# Altium PCB KUOZHAN.PCBDOC (part 11 of 21)
Units mm, origin at the board's own origin, x right, y up, seen from the top; angles counter-clockwise.
Board outline 165.51 x 116.38 mm, 2 copper layers (Top Layer, Bottom Layer); 171 components, 245 nets, 894 pads, 298 vias.
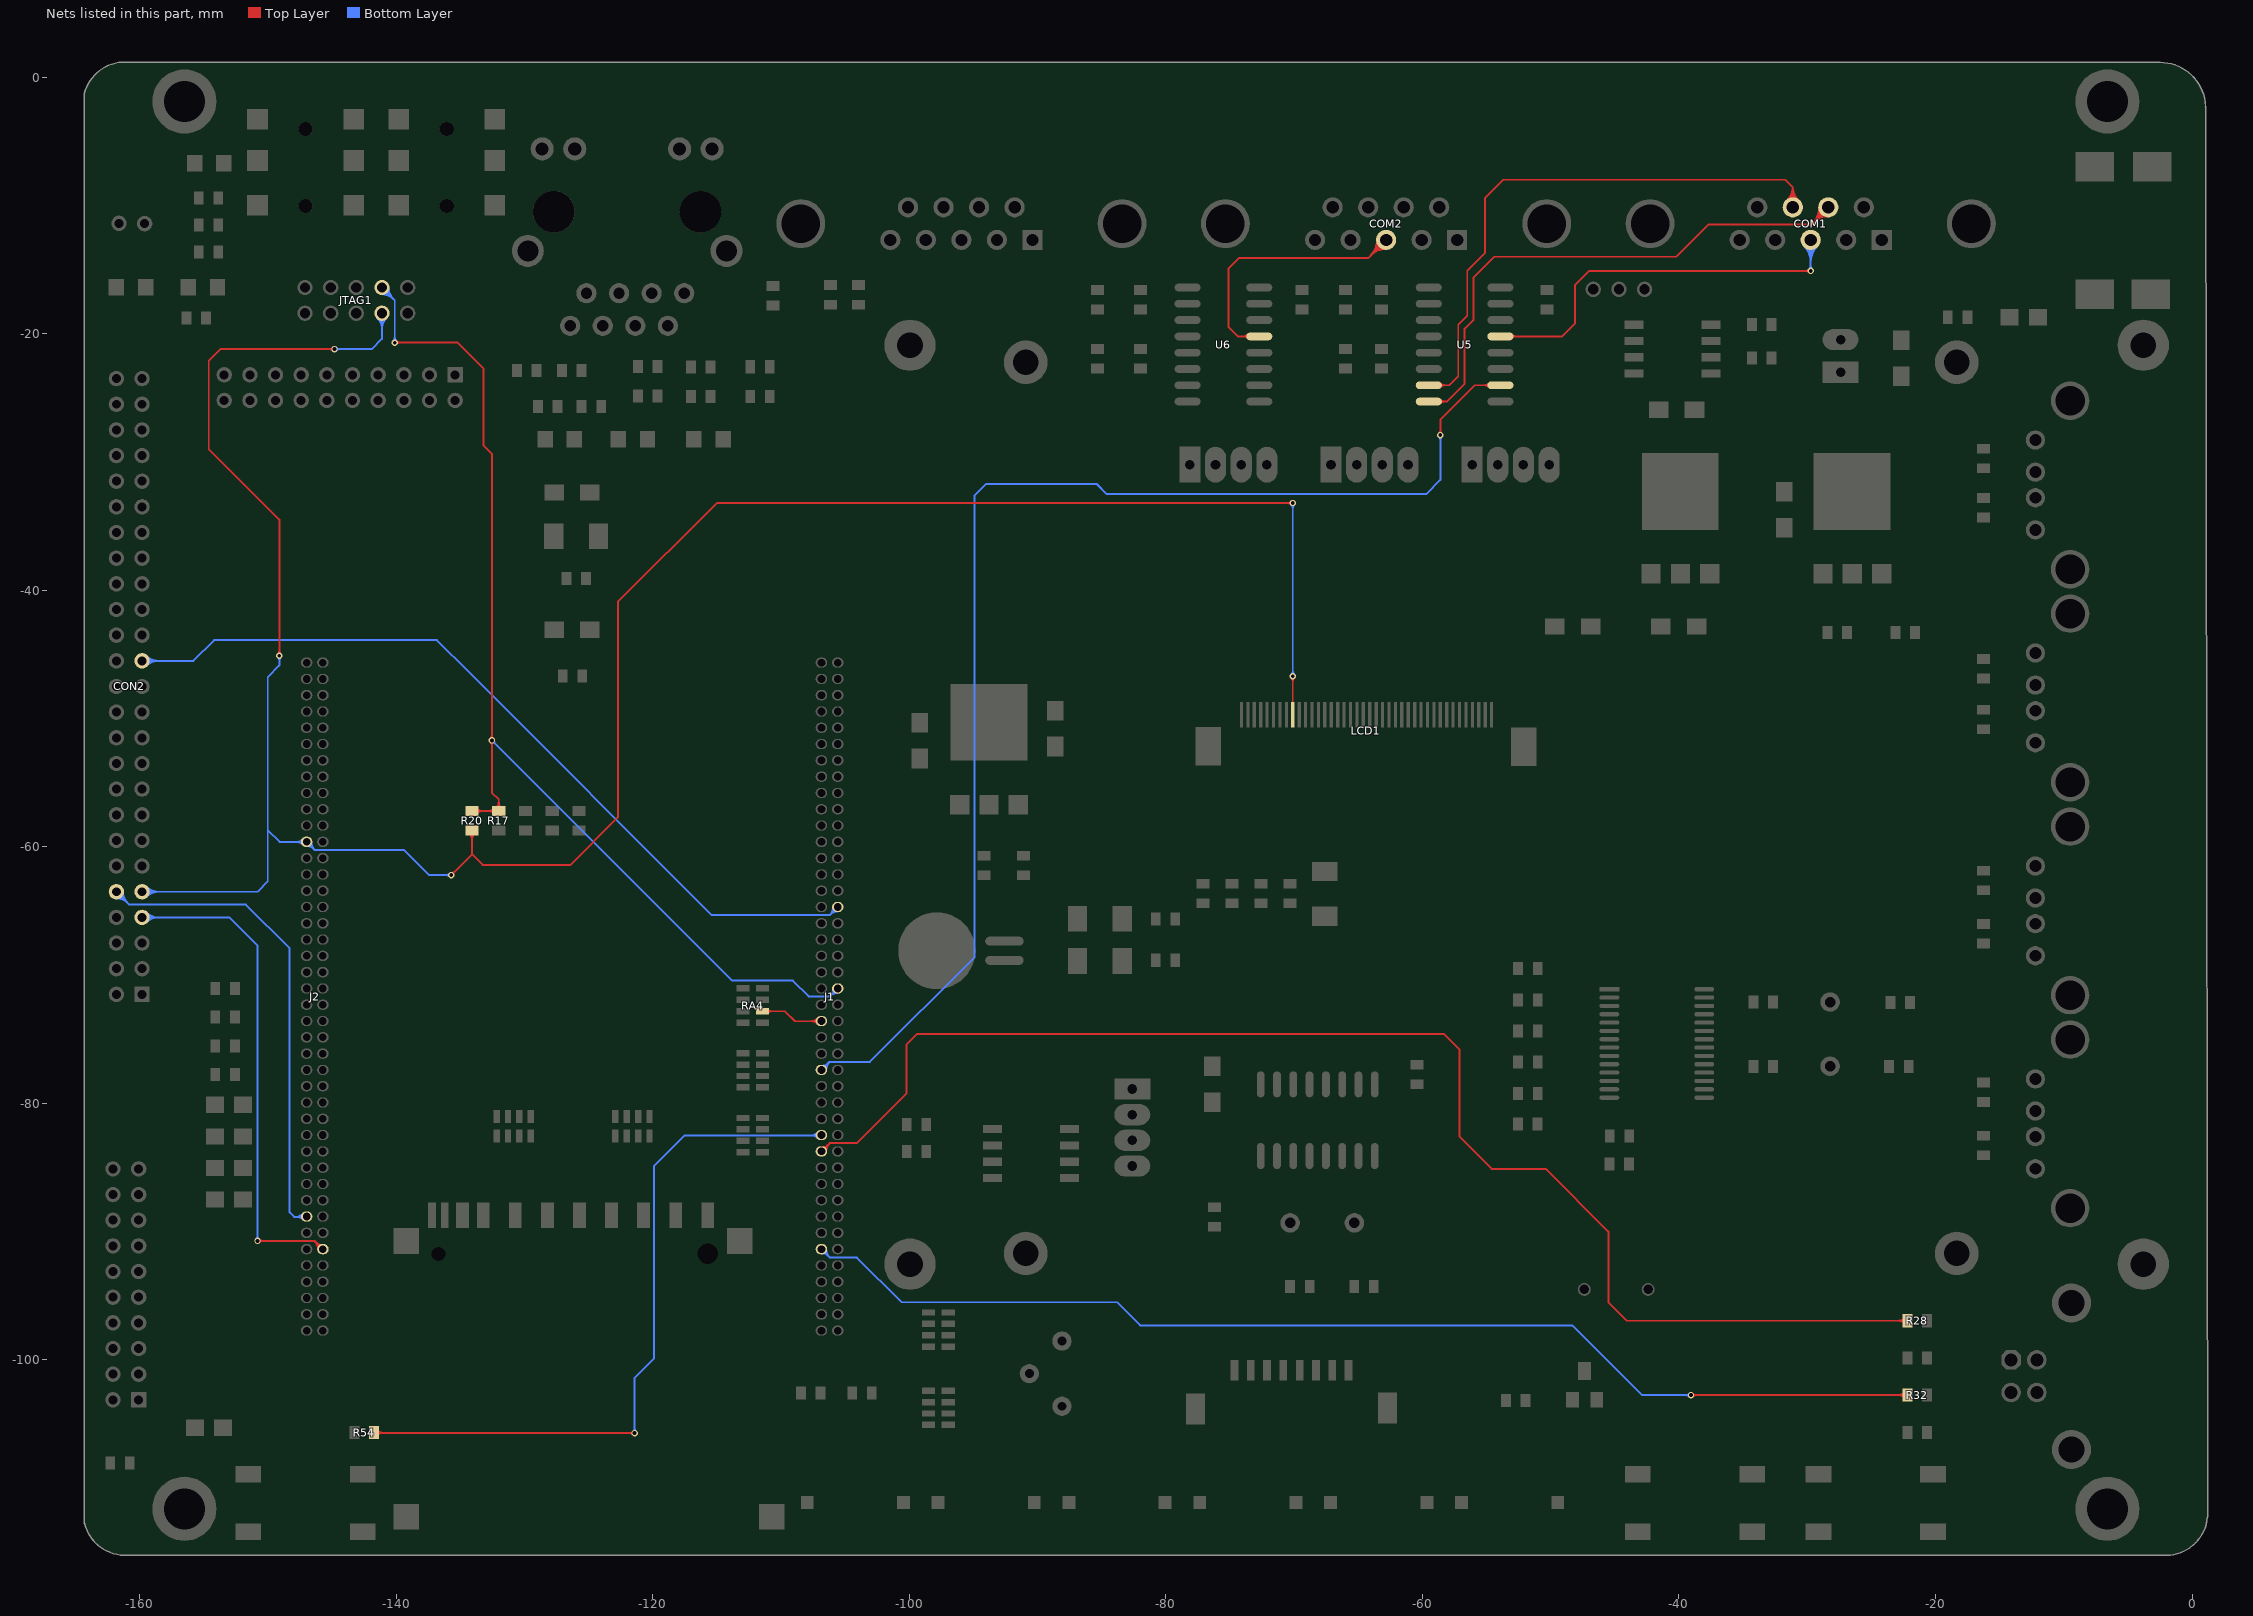
[diagram p11: the nets of this part, all layers, seen from the top]

## Via types
v1: diameter 0.5, hole 0.3, Top Layer to Bottom Layer, 272 vias
v2: diameter 0.6, hole 0.3, Top Layer to Bottom Layer, 24 vias
v3: diameter 0.9, hole 0.9, Top Layer to Bottom Layer, 2 vias

## Nets (pads, with @x,y where several pads share a name; then routed paths per layer and width w, separated by ;. In a path a pad name is that pad's centre, name@x,y a point inside that pad or via, vN(x,y) a via of type N, cw(c..) or ccw(c..) an arc to the next point about the centre after c; other vN are vias at no path point) (continued)
NRESET: CON2.9 J2.23 JTAG1.4 LCD1.32 R20.2 | length 269.3
  Top Layer w0.15: v1@-149.224,-44.976 ccw(c-149.522,-44.678) -149.1,-44.678 ccw(c-148.678,-44.678) v1@-148.976,-44.976 ; v1(-149.1,-45.1) -149.1,-34.5 -154.6,-29 -154.6,-22.1 -153.7,-21.2 v1(-144.8,-21.2) ; v1@-144.888,-21.288 ccw(c-145.102,-21.502) -145.102,-21.2 ccw(c-145.102,-20.898) v1@-144.888,-21.112 ; v1(-135.7,-62.2) -134.078,-60.578 ; v1@-135.7,-62.075 ccw(c-135.7,-61.773) -135.487,-61.987 ccw(c-135.273,-62.2) v1@-135.575,-62.2 ; R20.2@-134.078,-58.724 -134.078,-60.578 ; v1@-70.188,-46.788 cw(c-70.402,-47.002) -70.1,-47.002 cw(c-69.798,-47.002) v1@-70.012,-46.788 ; v1@-70.188,-33.288 ccw(c-70.402,-33.502) -70.402,-33.2 ccw(c-70.402,-32.898) v1@-70.188,-33.112 ; LCD1.32@-70.1,-49.7 v1(-70.1,-46.7) ; v1(-70.1,-33.2) -115,-33.2 -122.7,-40.9 -122.7,-57.7 -126.4,-61.4 -133.257,-61.4 -134.078,-60.578 ; -145.222,-21.2 cw(c-145.222,-21.622) v1@-144.924,-21.324 ; -145.222,-21.2 ccw(c-145.222,-20.778) v1@-144.924,-21.076 ; -145.222,-21.2 cw(c-145.222,-21.622) v1@-144.924,-21.324 ; -145.222,-21.2 ccw(c-145.222,-20.778) v1@-144.924,-21.076 ; -145.222,-21.2 cw(c-145.222,-21.622) v1@-144.924,-21.324 ; -145.222,-21.2 ccw(c-145.222,-20.778) v1@-144.924,-21.076 ; -145.222,-21.2 ccw(c-145.222,-20.778) v1@-144.924,-21.076 ; -145.222,-21.2 cw(c-145.222,-21.622) v1@-144.924,-21.324 ; v1@-135.7,-62.025 ccw(c-135.7,-61.603) -135.401,-61.901 ; v1@-135.7,-62.025 ccw(c-135.7,-61.603) -135.401,-61.901 ; v1@-135.7,-62.025 ccw(c-135.7,-61.603) -135.401,-61.901 ; v1@-135.7,-62.025 ccw(c-135.7,-61.603) -135.401,-61.901 ; v1@-135.525,-62.2 cw(c-135.103,-62.2) -135.401,-61.901 ; v1@-135.525,-62.2 cw(c-135.103,-62.2) -135.401,-61.901 ; v1@-135.525,-62.2 cw(c-135.103,-62.2) -135.401,-61.901 ; v1@-135.525,-62.2 cw(c-135.103,-62.2) -135.401,-61.901 ; R20.2@-134.295,-58.94 cw(c-134.817,-59.463) -134.078,-59.463 ; R20.2@-134.295,-58.94 cw(c-134.817,-59.463) -134.078,-59.463 ; R20.2@-134.295,-58.94 cw(c-134.817,-59.463) -134.078,-59.463 ; R20.2@-134.295,-58.94 cw(c-134.817,-59.463) -134.078,-59.463 ; R20.2@-134.295,-58.94 cw(c-134.817,-59.463) -134.078,-59.463 ; -134.078,-59.463 cw(c-133.34,-59.463) R20.2@-133.862,-58.94 ; -134.078,-59.463 cw(c-133.34,-59.463) R20.2@-133.862,-58.94 ; -134.078,-59.463 cw(c-133.34,-59.463) R20.2@-133.862,-58.94 ; -134.078,-59.463 cw(c-133.34,-59.463) R20.2@-133.862,-58.94 ; -134.078,-59.463 cw(c-133.34,-59.463) R20.2@-133.862,-58.94 ; -70.522,-33.2 cw(c-70.522,-33.622) v1@-70.224,-33.324 ; -70.522,-33.2 ccw(c-70.522,-32.778) v1@-70.224,-33.076 ; -70.522,-33.2 cw(c-70.522,-33.622) v1@-70.224,-33.324 ; -70.522,-33.2 ccw(c-70.522,-32.778) v1@-70.224,-33.076 ; -70.522,-33.2 cw(c-70.522,-33.622) v1@-70.224,-33.324 ; -70.522,-33.2 ccw(c-70.522,-32.778) v1@-70.224,-33.076 ; -70.522,-33.2 ccw(c-70.522,-32.778) v1@-70.224,-33.076 ; -70.522,-33.2 cw(c-70.522,-33.622) v1@-70.224,-33.324 ; v1@-70.224,-46.824 cw(c-70.522,-47.122) -70.1,-47.122 ; v1@-70.224,-46.824 cw(c-70.522,-47.122) -70.1,-47.122 ; v1@-70.224,-46.824 cw(c-70.522,-47.122) -70.1,-47.122 ; v1@-70.224,-46.824 cw(c-70.522,-47.122) -70.1,-47.122 ; -70.1,-47.122 cw(c-69.678,-47.122) v1@-69.976,-46.824 ; -70.1,-47.122 cw(c-69.678,-47.122) v1@-69.976,-46.824 ; -70.1,-47.122 cw(c-69.678,-47.122) v1@-69.976,-46.824 ; -70.1,-47.122 cw(c-69.678,-47.122) v1@-69.976,-46.824
  Bottom Layer w0.15: CON2.9@-159.8,-63.5 -150.8,-63.5 -150,-62.7 -150,-46.763 -149.1,-45.863 v1(-149.1,-45.1) ; CON2.9@-159.535,-63.765 cw(c-158.895,-64.405) -158.895,-63.5 cw(c-158.895,-62.595) CON2.9@-159.535,-63.235 ; CON2.9@-159.429,-63.871 cw(c-158.533,-64.767) -158.533,-63.5 cw(c-158.533,-62.233) CON2.9@-159.429,-63.129 ; -150,-58.7 -149.082,-59.618 -146.973,-59.618 -146.327,-60.264 ; v1@-149.188,-45.188 cw(c-149.402,-45.402) -149.1,-45.402 cw(c-148.798,-45.402) v1@-149.012,-45.188 ; J2.23@-146.973,-59.609 -146.348,-60.234 -139.379,-60.234 ; v1(-144.8,-21.2) -141.9,-21.2 -141.099,-20.399 JTAG1.4@-141.099,-18.403 ; v1@-144.712,-21.288 cw(c-144.498,-21.502) -144.498,-21.2 cw(c-144.498,-20.898) v1@-144.712,-21.112 ; -139.349,-60.264 -137.413,-62.2 v1(-135.7,-62.2) ; v1@-135.788,-62.288 ccw(c-136.002,-62.502) -136.002,-62.2 ccw(c-136.002,-61.898) v1@-135.788,-62.112 ; v1@-70.188,-46.612 ccw(c-70.402,-46.398) -70.1,-46.398 ccw(c-69.798,-46.398) v1@-70.012,-46.612 ; v1@-70.188,-33.288 cw(c-70.402,-33.502) -70.1,-33.502 cw(c-69.798,-33.502) v1@-70.012,-33.288 ; v1(-70.1,-46.7) v1(-70.1,-33.2) ; v1@-149.224,-45.224 cw(c-149.522,-45.522) -149.1,-45.522 ; v1@-149.224,-45.224 cw(c-149.522,-45.522) -149.1,-45.522 ; v1@-149.224,-45.224 cw(c-149.522,-45.522) -149.1,-45.522 ; v1@-149.224,-45.224 cw(c-149.522,-45.522) -149.1,-45.522 ; -149.1,-45.522 cw(c-148.678,-45.522) v1@-148.976,-45.224 ; -149.1,-45.522 cw(c-148.678,-45.522) v1@-148.976,-45.224 ; -149.1,-45.522 cw(c-148.678,-45.522) v1@-148.976,-45.224 ; -149.1,-45.522 cw(c-148.678,-45.522) v1@-148.976,-45.224 ; -147.757,-59.618 cw(c-147.757,-60.403) J2.23@-147.203,-59.848 ; -147.757,-59.618 ccw(c-147.757,-58.833) J2.23@-147.203,-59.388 ; -147.757,-59.618 cw(c-147.757,-60.403) J2.23@-147.203,-59.848 ; -147.757,-59.618 ccw(c-147.757,-58.833) J2.23@-147.203,-59.388 ; -147.757,-59.618 cw(c-147.757,-60.403) J2.23@-147.203,-59.848 ; -147.757,-59.618 ccw(c-147.757,-58.833) J2.23@-147.203,-59.388 ; J2.23@-147.395,-59.618 cw(c-147.395,-60.041) J2.23@-147.097,-59.742 ; J2.23@-147.395,-59.618 ccw(c-147.395,-59.196) J2.23@-147.097,-59.494 ; J2.23@-147.395,-59.618 cw(c-147.395,-60.041) J2.23@-147.097,-59.742 ; J2.23@-147.395,-59.618 ccw(c-147.395,-59.196) J2.23@-147.097,-59.494 ; J2.23@-147.395,-59.618 cw(c-147.395,-60.041) J2.23@-147.097,-59.742 ; J2.23@-147.395,-59.618 ccw(c-147.395,-59.196) J2.23@-147.097,-59.494 ; J2.23@-146.973,-59.943 cw(c-146.973,-60.728) -146.418,-60.173 ; J2.23@-146.973,-59.943 cw(c-146.973,-60.728) -146.418,-60.173 ; J2.23@-146.973,-59.943 cw(c-146.973,-60.728) -146.418,-60.173 ; J2.23@-146.973,-59.793 cw(c-146.973,-60.216) J2.23@-146.674,-59.917 ; J2.23@-146.973,-59.793 cw(c-146.973,-60.216) J2.23@-146.674,-59.917 ; J2.23@-146.973,-59.793 cw(c-146.973,-60.216) J2.23@-146.674,-59.917 ; J2.23@-146.923,-59.934 cw(c-146.923,-60.598) -146.453,-60.129 ccw(c-146.923,-60.598) J2.23@-146.923,-59.934 ; J2.23@-146.923,-59.934 cw(c-146.923,-60.577) -146.468,-60.123 ccw(c-146.923,-60.577) J2.23@-146.923,-59.934 ; J2.23@-146.798,-59.618 ccw(c-146.375,-59.618) J2.23@-146.674,-59.917 ; J2.23@-146.798,-59.618 ccw(c-146.375,-59.618) J2.23@-146.674,-59.917 ; J2.23@-146.798,-59.618 ccw(c-146.375,-59.618) J2.23@-146.674,-59.917 ; J2.23@-146.648,-59.618 ccw(c-145.863,-59.618) -146.418,-60.173 ; J2.23@-146.648,-59.618 ccw(c-145.863,-59.618) -146.418,-60.173 ; J2.23@-146.648,-59.618 ccw(c-145.863,-59.618) -146.418,-60.173 ; v1@-144.676,-21.324 cw(c-144.378,-21.622) -144.378,-21.2 ; v1@-144.676,-21.324 cw(c-144.378,-21.622) -144.378,-21.2 ; v1@-144.676,-21.324 cw(c-144.378,-21.622) -144.378,-21.2 ; v1@-144.676,-21.324 cw(c-144.378,-21.622) -144.378,-21.2 ; v1@-144.676,-21.076 ccw(c-144.378,-20.778) -144.378,-21.2 ; v1@-144.676,-21.076 ccw(c-144.378,-20.778) -144.378,-21.2 ; v1@-144.676,-21.076 ccw(c-144.378,-20.778) -144.378,-21.2 ; v1@-144.676,-21.076 ccw(c-144.378,-20.778) -144.378,-21.2 ; JTAG1.4@-141.47,-18.774 cw(c-142.366,-19.67) -141.099,-19.67 ; JTAG1.4@-141.47,-18.774 cw(c-142.366,-19.67) -141.099,-19.67 ; JTAG1.4@-141.47,-18.774 cw(c-142.366,-19.67) -141.099,-19.67 ; JTAG1.4@-141.47,-18.774 cw(c-142.366,-19.67) -141.099,-19.67 ; JTAG1.4@-141.47,-18.774 cw(c-142.366,-19.67) -141.099,-19.67 ; JTAG1.4@-141.364,-18.668 cw(c-142.004,-19.308) -141.099,-19.308 ; JTAG1.4@-141.364,-18.668 cw(c-142.004,-19.308) -141.099,-19.308 ; JTAG1.4@-141.364,-18.668 cw(c-142.004,-19.308) -141.099,-19.308 ; JTAG1.4@-141.364,-18.668 cw(c-142.004,-19.308) -141.099,-19.308 ; JTAG1.4@-141.364,-18.668 cw(c-142.004,-19.308) -141.099,-19.308 ; -141.099,-19.67 cw(c-139.831,-19.67) JTAG1.4@-140.728,-18.774 ; -141.099,-19.67 cw(c-139.831,-19.67) JTAG1.4@-140.728,-18.774 ; -141.099,-19.67 cw(c-139.831,-19.67) JTAG1.4@-140.728,-18.774 ; -141.099,-19.67 cw(c-139.831,-19.67) JTAG1.4@-140.728,-18.774 ; -141.099,-19.67 cw(c-139.831,-19.67) JTAG1.4@-140.728,-18.774 ; -141.099,-19.308 cw(c-140.193,-19.308) JTAG1.4@-140.834,-18.668 ; -141.099,-19.308 cw(c-140.193,-19.308) JTAG1.4@-140.834,-18.668 ; -141.099,-19.308 cw(c-140.193,-19.308) JTAG1.4@-140.834,-18.668 ; -141.099,-19.308 cw(c-140.193,-19.308) JTAG1.4@-140.834,-18.668 ; -141.099,-19.308 cw(c-140.193,-19.308) JTAG1.4@-140.834,-18.668 ; -136.122,-62.2 cw(c-136.122,-62.622) v1@-135.824,-62.324 ; -136.122,-62.2 ccw(c-136.122,-61.778) v1@-135.824,-62.076 ; -136.122,-62.2 cw(c-136.122,-62.622) v1@-135.824,-62.324 ; -136.122,-62.2 ccw(c-136.122,-61.778) v1@-135.824,-62.076 ; -136.122,-62.2 cw(c-136.122,-62.622) v1@-135.824,-62.324 ; -136.122,-62.2 ccw(c-136.122,-61.778) v1@-135.824,-62.076 ; -136.122,-62.2 ccw(c-136.122,-61.778) v1@-135.824,-62.076 ; -136.122,-62.2 cw(c-136.122,-62.622) v1@-135.824,-62.324 ; v1@-70.224,-46.576 ccw(c-70.522,-46.278) -70.1,-46.278 ; v1@-70.224,-46.576 ccw(c-70.522,-46.278) -70.1,-46.278 ; v1@-70.224,-46.576 ccw(c-70.522,-46.278) -70.1,-46.278 ; v1@-70.224,-46.576 ccw(c-70.522,-46.278) -70.1,-46.278 ; v1@-70.224,-33.324 cw(c-70.522,-33.622) -70.1,-33.622 ; v1@-70.224,-33.324 cw(c-70.522,-33.622) -70.1,-33.622 ; v1@-70.224,-33.324 cw(c-70.522,-33.622) -70.1,-33.622 ; v1@-70.224,-33.324 cw(c-70.522,-33.622) -70.1,-33.622 ; -70.1,-46.278 ccw(c-69.678,-46.278) v1@-69.976,-46.576 ; -70.1,-46.278 ccw(c-69.678,-46.278) v1@-69.976,-46.576 ; -70.1,-46.278 ccw(c-69.678,-46.278) v1@-69.976,-46.576 ; -70.1,-46.278 ccw(c-69.678,-46.278) v1@-69.976,-46.576 ; -70.1,-33.622 cw(c-69.678,-33.622) v1@-69.976,-33.324 ; -70.1,-33.622 cw(c-69.678,-33.622) v1@-69.976,-33.324 ; -70.1,-33.622 cw(c-69.678,-33.622) v1@-69.976,-33.324 ; -70.1,-33.622 cw(c-69.678,-33.622) v1@-69.976,-33.324 ; -147.828,-59.618 ccw(c-147.828,-58.804) -147.253,-59.38 cw(c-147.828,-58.804) -147.828,-59.618 ; -147.786,-59.618 cw(c-147.786,-60.373) -147.253,-59.839 ccw(c-147.786,-60.373) -147.786,-59.618 ; -147.466,-59.618 ccw(c-147.466,-59.166) -147.147,-59.486 cw(c-147.466,-59.166) -147.466,-59.618 ; -147.424,-59.618 cw(c-147.424,-60.011) -147.147,-59.733 ccw(c-147.424,-60.011) -147.424,-59.618 ; J2.23@-146.748,-59.618 ccw(c-146.283,-59.641) -146.612,-59.97 cw(c-146.283,-59.641) J2.23@-146.748,-59.618 ; J2.23@-146.748,-59.616 ccw(c-146.243,-59.633) -146.6,-59.991 cw(c-146.243,-59.633) J2.23@-146.748,-59.616 ; J2.23@-146.598,-59.625 ccw(c-145.827,-59.663) -146.373,-60.209 cw(c-145.827,-59.663) J2.23@-146.598,-59.625 ; J2.23@-146.598,-59.621 ccw(c-145.772,-59.65) -146.356,-60.235 cw(c-145.772,-59.65) J2.23@-146.598,-59.621
NRTS0: J1.51 U5.10 | length 123.2
  Top Layer w0.15: v1@-58.688,-27.812 ccw(c-58.902,-27.598) -58.6,-27.598 ccw(c-58.298,-27.598) v1@-58.512,-27.812 ; v1(-58.6,-27.9) -58.6,-26.7 -55.92,-24.02 U5.10@-53.912,-24.02 ; v1@-58.724,-27.776 ccw(c-59.022,-27.478) -58.6,-27.478 ; v1@-58.724,-27.776 ccw(c-59.022,-27.478) -58.6,-27.478 ; v1@-58.724,-27.776 ccw(c-59.022,-27.478) -58.6,-27.478 ; v1@-58.724,-27.776 ccw(c-59.022,-27.478) -58.6,-27.478 ; -58.6,-27.478 ccw(c-58.178,-27.478) v1@-58.476,-27.776 ; -58.6,-27.478 ccw(c-58.178,-27.478) v1@-58.476,-27.776 ; -58.6,-27.478 ccw(c-58.178,-27.478) v1@-58.476,-27.776 ; -58.6,-27.478 ccw(c-58.178,-27.478) v1@-58.476,-27.776 ; -55.178,-24.02 cw(c-55.178,-24.575) U5.10@-54.786,-24.182 ; -55.178,-24.02 ccw(c-55.178,-23.465) U5.10@-54.786,-23.858 ; -55.178,-24.02 cw(c-55.178,-24.575) U5.10@-54.786,-24.182 ; -55.178,-24.02 ccw(c-55.178,-23.465) U5.10@-54.786,-23.858 ; -55.178,-24.02 cw(c-55.178,-24.575) U5.10@-54.786,-24.182 ; -55.178,-24.02 ccw(c-55.178,-23.465) U5.10@-54.786,-23.858 ; -55.178,-24.02 cw(c-55.178,-24.575) U5.10@-54.786,-24.182 ; -55.178,-24.02 ccw(c-55.178,-23.465) U5.10@-54.786,-23.858 ; -55.178,-24.02 ccw(c-55.178,-23.465) U5.10@-54.786,-23.858 ; -55.178,-24.02 cw(c-55.178,-24.575) U5.10@-54.786,-24.182
  Bottom Layer w0.15: J1.51@-106.841,-77.41 -106.216,-76.785 ; J1.51@-106.841,-77.389 -106.216,-76.764 ; v1@-58.688,-27.988 cw(c-58.902,-28.202) -58.6,-28.202 cw(c-58.298,-28.202) v1@-58.512,-27.988 ; v1(-58.6,-27.9) -58.6,-31.4 -59.7,-32.5 -84.6,-32.5 -85.4,-31.7 -94,-31.7 -94.9,-32.6 -94.9,-68.6 -103.064,-76.764 -106.216,-76.764 ; J1.51@-106.841,-77.235 ccw(c-106.841,-76.813) J1.51@-106.542,-77.112 ; J1.51@-106.841,-77.235 ccw(c-106.841,-76.813) J1.51@-106.542,-77.112 ; J1.51@-106.841,-77.235 ccw(c-106.841,-76.813) J1.51@-106.542,-77.112 ; J1.51@-106.841,-77.085 ccw(c-106.841,-76.301) -106.286,-76.856 ; J1.51@-106.841,-77.085 ccw(c-106.841,-76.301) -106.286,-76.856 ; J1.51@-106.841,-77.085 ccw(c-106.841,-76.301) -106.286,-76.856 ; J1.51@-106.791,-77.064 ccw(c-106.791,-76.4) -106.321,-76.87 cw(c-106.791,-76.4) J1.51@-106.791,-77.064 ; J1.51@-106.791,-77.064 ccw(c-106.791,-76.35) -106.285,-76.855 ; J1.51@-106.791,-77.064 ccw(c-106.791,-76.35) -106.285,-76.855 ; J1.51@-106.666,-77.41 cw(c-106.243,-77.41) J1.51@-106.542,-77.112 ; J1.51@-106.666,-77.41 cw(c-106.243,-77.41) J1.51@-106.542,-77.112 ; J1.51@-106.666,-77.41 cw(c-106.243,-77.41) J1.51@-106.542,-77.112 ; J1.51@-106.516,-77.41 cw(c-105.731,-77.41) -106.286,-76.856 ; J1.51@-106.516,-77.41 cw(c-105.731,-77.41) -106.286,-76.856 ; J1.51@-106.516,-77.41 cw(c-105.731,-77.41) -106.286,-76.856 ; -106.216,-76.785 ccw(c-105.612,-77.389) -106.466,-77.389 cw(c-105.612,-77.389) -106.216,-76.785 ; -106.216,-76.764 ccw(c-105.612,-77.368) -106.466,-77.384 cw(c-105.612,-77.368) -106.216,-76.764 ; v1@-58.724,-28.024 cw(c-59.022,-28.322) -58.6,-28.322 ; v1@-58.724,-28.024 cw(c-59.022,-28.322) -58.6,-28.322 ; v1@-58.724,-28.024 cw(c-59.022,-28.322) -58.6,-28.322 ; v1@-58.724,-28.024 cw(c-59.022,-28.322) -58.6,-28.322 ; -58.6,-28.322 cw(c-58.178,-28.322) v1@-58.476,-28.024 ; -58.6,-28.322 cw(c-58.178,-28.322) v1@-58.476,-28.024 ; -58.6,-28.322 cw(c-58.178,-28.322) v1@-58.476,-28.024 ; -58.6,-28.322 cw(c-58.178,-28.322) v1@-58.476,-28.024 ; J1.51@-106.616,-77.389 cw(c-106.124,-77.389) -106.472,-77.041 ccw(c-106.124,-77.389) J1.51@-106.616,-77.389 ; J1.51@-106.616,-77.386 cw(c-106.103,-77.377) -106.466,-77.014 ccw(c-106.103,-77.377) J1.51@-106.616,-77.386
NSS_SPI: J1.45 RA4.2 | length 17.1
  Top Layer w0.15: RA4.2@-111.42,-72.815 -109.685,-72.815 -108.902,-73.598 J1.45@-106.841,-73.598 ; RA4.2@-111.038,-72.939 cw(c-110.739,-73.237) -110.739,-72.815 ; RA4.2@-111.038,-72.939 cw(c-110.739,-73.237) -110.739,-72.815 ; RA4.2@-111.038,-72.939 cw(c-110.739,-73.237) -110.739,-72.815 ; RA4.2@-111.038,-72.939 cw(c-110.739,-73.237) -110.739,-72.815 ; RA4.2@-111.038,-72.939 cw(c-110.739,-73.237) -110.739,-72.815 ; RA4.2@-111.038,-72.691 ccw(c-110.739,-72.392) -110.739,-72.815 ; RA4.2@-111.038,-72.691 ccw(c-110.739,-72.392) -110.739,-72.815 ; RA4.2@-111.038,-72.691 ccw(c-110.739,-72.392) -110.739,-72.815 ; RA4.2@-111.038,-72.691 ccw(c-110.739,-72.392) -110.739,-72.815 ; RA4.2@-111.038,-72.691 ccw(c-110.739,-72.392) -110.739,-72.815 ; -107.625,-73.598 cw(c-107.625,-74.382) J1.45@-107.071,-73.828 ; -107.625,-73.598 ccw(c-107.625,-72.813) J1.45@-107.071,-73.368 ; -107.625,-73.598 cw(c-107.625,-74.382) J1.45@-107.071,-73.828 ; -107.625,-73.598 ccw(c-107.625,-72.813) J1.45@-107.071,-73.368 ; -107.625,-73.598 cw(c-107.625,-74.382) J1.45@-107.071,-73.828 ; -107.625,-73.598 ccw(c-107.625,-72.813) J1.45@-107.071,-73.368 ; J1.45@-107.263,-73.598 cw(c-107.263,-74.02) J1.45@-106.965,-73.721 ; J1.45@-107.263,-73.598 ccw(c-107.263,-73.175) J1.45@-106.965,-73.474 ; J1.45@-107.263,-73.598 cw(c-107.263,-74.02) J1.45@-106.965,-73.721 ; J1.45@-107.263,-73.598 ccw(c-107.263,-73.175) J1.45@-106.965,-73.474 ; J1.45@-107.263,-73.598 cw(c-107.263,-74.02) J1.45@-106.965,-73.721 ; J1.45@-107.263,-73.598 ccw(c-107.263,-73.175) J1.45@-106.965,-73.474 ; -107.72,-73.598 ccw(c-107.72,-72.75) -107.121,-73.35 cw(c-107.72,-72.75) -107.72,-73.598 ; -107.631,-73.598 cw(c-107.631,-74.32) -107.121,-73.809 ccw(c-107.631,-74.32) -107.631,-73.598 ; -107.358,-73.598 ccw(c-107.358,-73.112) -107.015,-73.456 cw(c-107.358,-73.112) -107.358,-73.598
NTRST: J1.42 JTAG1.3 R17.2 R20.1 | length 143.7
  Top Layer w0.15: v1(-140.1,-20.7) -135.2,-20.7 -133.2,-22.7 -133.2,-28.7 -132.527,-29.373 -132.527,-55.773 -131.995,-56.305 R17.2@-131.995,-57.2 R20.1@-134.078,-57.2 ; v1@-140.012,-20.788 cw(c-139.798,-21.002) -139.798,-20.7 cw(c-139.798,-20.398) v1@-140.012,-20.612 ; v1@-132.614,-51.787 cw(c-132.824,-51.998) -132.527,-51.998 ; v1@-132.614,-51.61 ccw(c-132.824,-51.4) -132.527,-51.4 ; -132.527,-52.003 cw(c-132.221,-52.003) v1@-132.437,-51.787 ; -132.527,-51.394 ccw(c-132.221,-51.394) v1@-132.437,-51.61 ; v1@-139.976,-20.824 cw(c-139.678,-21.122) -139.678,-20.7 ; v1@-139.976,-20.824 cw(c-139.678,-21.122) -139.678,-20.7 ; v1@-139.976,-20.824 cw(c-139.678,-21.122) -139.678,-20.7 ; v1@-139.976,-20.824 cw(c-139.678,-21.122) -139.678,-20.7 ; v1@-139.976,-20.576 ccw(c-139.678,-20.278) -139.678,-20.7 ; v1@-139.976,-20.576 ccw(c-139.678,-20.278) -139.678,-20.7 ; v1@-139.976,-20.576 ccw(c-139.678,-20.278) -139.678,-20.7 ; v1@-139.976,-20.576 ccw(c-139.678,-20.278) -139.678,-20.7 ; R20.1@-133.735,-57.416 cw(c-133.213,-57.939) -133.213,-57.2 ; R20.1@-133.735,-57.416 cw(c-133.213,-57.939) -133.213,-57.2 ; R20.1@-133.735,-57.416 cw(c-133.213,-57.939) -133.213,-57.2 ; R20.1@-133.735,-57.416 cw(c-133.213,-57.939) -133.213,-57.2 ; R20.1@-133.735,-57.416 cw(c-133.213,-57.939) -133.213,-57.2 ; R20.1@-133.735,-56.984 ccw(c-133.213,-56.461) -133.213,-57.2 ; R20.1@-133.735,-56.984 ccw(c-133.213,-56.461) -133.213,-57.2 ; R20.1@-133.735,-56.984 ccw(c-133.213,-56.461) -133.213,-57.2 ; R20.1@-133.735,-56.984 ccw(c-133.213,-56.461) -133.213,-57.2 ; R20.1@-133.735,-56.984 ccw(c-133.213,-56.461) -133.213,-57.2 ; -132.861,-57.2 cw(c-132.861,-57.939) R17.2@-132.338,-57.416 ; -132.861,-57.2 ccw(c-132.861,-56.461) R17.2@-132.338,-56.984 ; -132.861,-57.2 cw(c-132.861,-57.939) R17.2@-132.338,-57.416 ; -132.861,-57.2 ccw(c-132.861,-56.461) R17.2@-132.338,-56.984 ; -132.861,-57.2 cw(c-132.861,-57.939) R17.2@-132.338,-57.416 ; -132.861,-57.2 ccw(c-132.861,-56.461) R17.2@-132.338,-56.984 ; -132.861,-57.2 cw(c-132.861,-57.939) R17.2@-132.338,-57.416 ; -132.861,-57.2 ccw(c-132.861,-56.461) R17.2@-132.338,-56.984 ; -132.861,-57.2 ccw(c-132.861,-56.461) R17.2@-132.338,-56.984 ; -132.861,-57.2 cw(c-132.861,-57.939) R17.2@-132.338,-57.416 ; v1@-132.649,-51.575 ccw(c-132.945,-51.279) -132.527,-51.279 ; v1@-132.649,-51.575 ccw(c-132.945,-51.279) -132.527,-51.279 ; v1@-132.649,-51.575 ccw(c-132.945,-51.279) -132.527,-51.279 ; v1@-132.649,-51.575 ccw(c-132.945,-51.279) -132.527,-51.279 ; -132.527,-52.073 cw(c-132.215,-52.073) -132.414,-51.834 ccw(c-132.215,-52.073) -132.527,-52.073 ; -132.527,-52.073 ccw(c-132.842,-52.073) -132.638,-51.833 cw(c-132.842,-52.073) -132.527,-52.073 ; -132.527,-51.274 ccw(c-132.1,-51.274) v1@-132.402,-51.575 ; -132.527,-51.274 ccw(c-132.1,-51.274) v1@-132.402,-51.575 ; -132.527,-51.274 ccw(c-132.1,-51.274) v1@-132.402,-51.575 ; -132.527,-51.274 ccw(c-132.1,-51.274) v1@-132.402,-51.575 ; R17.2@-132.211,-56.984 ccw(c-132.734,-56.461) -131.995,-56.461 ; R17.2@-132.211,-56.984 ccw(c-132.734,-56.461) -131.995,-56.461 ; R17.2@-132.211,-56.984 ccw(c-132.734,-56.461) -131.995,-56.461 ; R17.2@-132.211,-56.984 ccw(c-132.734,-56.461) -131.995,-56.461 ; R17.2@-132.211,-56.984 ccw(c-132.734,-56.461) -131.995,-56.461 ; -131.995,-56.461 ccw(c-131.256,-56.461) R17.2@-131.778,-56.984 ; -131.995,-56.461 ccw(c-131.256,-56.461) R17.2@-131.778,-56.984 ; -131.995,-56.461 ccw(c-131.256,-56.461) R17.2@-131.778,-56.984 ; -131.995,-56.461 ccw(c-131.256,-56.461) R17.2@-131.778,-56.984 ; -131.995,-56.461 ccw(c-131.256,-56.461) R17.2@-131.778,-56.984 ; v1@-132.649,-51.823 cw(c-132.945,-52.119) -132.527,-52.119 ccw(c-132.945,-52.119) v1@-132.649,-51.823 ; -132.527,-52.124 cw(c-132.1,-52.124) -132.402,-51.823 ccw(c-132.1,-52.124) -132.527,-52.124
  Bottom Layer w0.15: JTAG1.3@-141.099,-16.403 -140.1,-17.401 v1(-140.1,-20.7) ; v1@-140.188,-20.612 ccw(c-140.402,-20.398) -140.1,-20.398 ccw(c-139.798,-20.398) v1@-140.012,-20.612 ; v1@-132.525,-51.824 cw(c-132.525,-52.126) -132.312,-51.912 cw(c-132.099,-51.699) v1@-132.4,-51.699 ; v1(-132.525,-51.699) -113.793,-70.431 -109.069,-70.431 -107.836,-71.664 -106.196,-71.664 J1.42@-105.571,-71.039 ; JTAG1.3@-141.099,-16.928 cw(c-141.099,-18.195) -140.203,-17.299 ; JTAG1.3@-141.099,-16.928 cw(c-141.099,-18.195) -140.203,-17.299 ; JTAG1.3@-141.099,-16.928 cw(c-141.099,-18.195) -140.203,-17.299 ; JTAG1.3@-141.099,-16.928 cw(c-141.099,-18.195) -140.203,-17.299 ; JTAG1.3@-141.099,-16.928 cw(c-141.099,-18.195) -140.203,-17.299 ; JTAG1.3@-141.099,-16.778 cw(c-141.099,-17.683) -140.459,-17.043 ; JTAG1.3@-141.099,-16.778 cw(c-141.099,-17.683) -140.459,-17.043 ; JTAG1.3@-141.099,-16.778 cw(c-141.099,-17.683) -140.459,-17.043 ; JTAG1.3@-141.099,-16.778 cw(c-141.099,-17.683) -140.459,-17.043 ; JTAG1.3@-141.099,-16.778 cw(c-141.099,-17.683) -140.459,-17.043 ; JTAG1.3@-140.724,-16.403 ccw(c-139.818,-16.403) -140.459,-17.043 ; JTAG1.3@-140.724,-16.403 ccw(c-139.818,-16.403) -140.459,-17.043 ; JTAG1.3@-140.724,-16.403 ccw(c-139.818,-16.403) -140.459,-17.043 ; JTAG1.3@-140.724,-16.403 ccw(c-139.818,-16.403) -140.459,-17.043 ; JTAG1.3@-140.724,-16.403 ccw(c-139.818,-16.403) -140.459,-17.043 ; JTAG1.3@-140.574,-16.403 ccw(c-139.306,-16.403) -140.203,-17.299 ; JTAG1.3@-140.574,-16.403 ccw(c-139.306,-16.403) -140.203,-17.299 ; JTAG1.3@-140.574,-16.403 ccw(c-139.306,-16.403) -140.203,-17.299 ; JTAG1.3@-140.574,-16.403 ccw(c-139.306,-16.403) -140.203,-17.299 ; JTAG1.3@-140.574,-16.403 ccw(c-139.306,-16.403) -140.203,-17.299 ; v1@-140.224,-20.576 ccw(c-140.522,-20.278) -140.1,-20.278 ; v1@-140.224,-20.576 ccw(c-140.522,-20.278) -140.1,-20.278 ; v1@-140.224,-20.576 ccw(c-140.522,-20.278) -140.1,-20.278 ; v1@-140.224,-20.576 ccw(c-140.522,-20.278) -140.1,-20.278 ; -140.1,-20.278 ccw(c-139.678,-20.278) v1@-139.976,-20.576 ; -140.1,-20.278 ccw(c-139.678,-20.278) v1@-139.976,-20.576 ; -140.1,-20.278 ccw(c-139.678,-20.278) v1@-139.976,-20.576 ; -140.1,-20.278 ccw(c-139.678,-20.278) v1@-139.976,-20.576 ; v1@-132.525,-51.874 cw(c-132.525,-52.296) -132.227,-51.998 ; v1@-132.525,-51.874 cw(c-132.525,-52.296) -132.227,-51.998 ; v1@-132.525,-51.874 cw(c-132.525,-52.296) -132.227,-51.998 ; v1@-132.525,-51.874 cw(c-132.525,-52.296) -132.227,-51.998 ; v1@-132.35,-51.699 ccw(c-131.928,-51.699) -132.227,-51.998 ; v1@-132.35,-51.699 ccw(c-131.928,-51.699) -132.227,-51.998 ; v1@-132.35,-51.699 ccw(c-131.928,-51.699) -132.227,-51.998 ; v1@-132.35,-51.699 ccw(c-131.928,-51.699) -132.227,-51.998 ; -106.126,-71.611 cw(c-105.571,-72.166) J1.42@-105.571,-71.381 ; -106.126,-71.611 ccw(c-106.68,-71.056) J1.42@-105.896,-71.056 ; -106.126,-71.611 cw(c-105.571,-72.166) J1.42@-105.571,-71.381 ; -106.126,-71.611 ccw(c-106.68,-71.056) J1.42@-105.896,-71.056 ; -106.126,-71.611 cw(c-105.571,-72.166) J1.42@-105.571,-71.381 ; -106.126,-71.611 ccw(c-106.68,-71.056) J1.42@-105.896,-71.056 ; -105.87,-71.355 cw(c-105.571,-71.653) J1.42@-105.571,-71.231 ; -105.87,-71.355 ccw(c-106.168,-71.056) J1.42@-105.746,-71.056 ; -105.87,-71.355 cw(c-105.571,-71.653) J1.42@-105.571,-71.231 ; -105.87,-71.355 ccw(c-106.168,-71.056) J1.42@-105.746,-71.056 ; -105.87,-71.355 cw(c-105.571,-71.653) J1.42@-105.571,-71.231 ; -105.87,-71.355 ccw(c-106.168,-71.056) J1.42@-105.746,-71.056 ; -106.171,-71.639 ccw(c-106.717,-71.093) -105.945,-71.055 cw(c-106.717,-71.093) -106.171,-71.639 ; -106.09,-71.559 cw(c-105.621,-72.028) -105.621,-71.364 ccw(c-105.621,-72.028) -106.09,-71.559 ; -105.931,-71.4 ccw(c-106.261,-71.071) -105.796,-71.048 cw(c-106.261,-71.071) -105.931,-71.4
NWAIT: CON2.27 J1.32 | length 76.2
  Bottom Layer w0.15: CON2.27@-159.8,-45.5 -155.8,-45.5 -154.181,-43.881 -136.819,-43.881 -134.312,-46.388 -115.373,-65.327 -107.1,-65.327 -106.196,-65.327 J1.32@-105.571,-64.702 ; CON2.27@-159.535,-45.765 cw(c-158.895,-46.405) -158.895,-45.5 cw(c-158.895,-44.595) CON2.27@-159.535,-45.235 ; CON2.27@-159.429,-45.871 cw(c-158.533,-46.767) -158.533,-45.5 cw(c-158.533,-44.233) CON2.27@-159.429,-45.129 ; -106.126,-65.256 cw(c-105.571,-65.811) J1.32@-105.571,-65.027 ; -106.126,-65.256 ccw(c-106.68,-64.702) J1.32@-105.896,-64.702 ; -106.126,-65.256 cw(c-105.571,-65.811) J1.32@-105.571,-65.027 ; -106.126,-65.256 ccw(c-106.68,-64.702) J1.32@-105.896,-64.702 ; -106.126,-65.256 cw(c-105.571,-65.811) J1.32@-105.571,-65.027 ; -106.126,-65.256 ccw(c-106.68,-64.702) J1.32@-105.896,-64.702 ; J1.32@-105.87,-65 cw(c-105.571,-65.299) J1.32@-105.571,-64.877 ; J1.32@-105.87,-65 ccw(c-106.168,-64.702) J1.32@-105.746,-64.702 ; J1.32@-105.87,-65 cw(c-105.571,-65.299) J1.32@-105.571,-64.877 ; J1.32@-105.87,-65 ccw(c-106.168,-64.702) J1.32@-105.746,-64.702 ; J1.32@-105.87,-65 cw(c-105.571,-65.299) J1.32@-105.571,-64.877 ; J1.32@-105.87,-65 ccw(c-106.168,-64.702) J1.32@-105.746,-64.702 ; -106.165,-65.295 ccw(c-106.699,-64.761) -105.945,-64.711 cw(c-106.699,-64.761) -106.165,-65.295 ; -106.069,-65.2 cw(c-105.621,-65.649) -105.621,-65.014 ccw(c-105.621,-65.649) -106.069,-65.2 ; -105.931,-65.062 ccw(c-106.261,-64.732) -105.795,-64.701 cw(c-106.261,-64.732) -105.931,-65.062
NXDACK0: CON2.7 J2.74 | length 57.4
  Top Layer w0.15: v1(-150.8,-90.714) -146.348,-90.714 J2.74@-145.703,-91.359 ; -146.328,-90.765 J2.74@-145.703,-91.39 ; -150.378,-90.714 cw(c-150.378,-90.292) -150.676,-90.591 ccw(c-150.378,-90.292) -150.378,-90.714 ; -150.378,-90.714 ccw(c-150.378,-91.137) -150.676,-90.838 cw(c-150.378,-91.137) -150.378,-90.714 ; -146.258,-90.835 cw(c-146.812,-91.39) J2.74@-146.028,-91.39 ; -146.258,-90.835 ccw(c-145.703,-90.28) J2.74@-145.703,-91.065 ; -146.258,-90.835 cw(c-146.812,-91.39) J2.74@-146.028,-91.39 ; -146.258,-90.835 ccw(c-145.703,-90.28) J2.74@-145.703,-91.065 ; -146.258,-90.835 cw(c-146.812,-91.39) J2.74@-146.028,-91.39 ; -146.258,-90.835 ccw(c-145.703,-90.28) J2.74@-145.703,-91.065 ; J2.74@-146.078,-91.359 ccw(c-146.909,-91.359) -146.321,-90.772 cw(c-146.909,-91.359) J2.74@-146.078,-91.359 ; J2.74@-146.078,-91.359 ccw(c-146.983,-91.359) -146.343,-90.719 cw(c-146.983,-91.359) J2.74@-146.078,-91.359 ; J2.74@-146.002,-91.091 cw(c-146.3,-91.39) J2.74@-145.878,-91.39 ; J2.74@-146.002,-91.091 ccw(c-145.703,-90.793) J2.74@-145.703,-91.215 ; J2.74@-146.002,-91.091 cw(c-146.3,-91.39) J2.74@-145.878,-91.39 ; J2.74@-146.002,-91.091 ccw(c-145.703,-90.793) J2.74@-145.703,-91.215 ; J2.74@-146.002,-91.091 cw(c-146.3,-91.39) J2.74@-145.878,-91.39 ; J2.74@-146.002,-91.091 ccw(c-145.703,-90.793) J2.74@-145.703,-91.215 ; J2.74@-145.928,-91.359 ccw(c-146.397,-91.359) -146.065,-91.028 cw(c-146.397,-91.359) J2.74@-145.928,-91.359 ; J2.74@-145.928,-91.359 ccw(c-146.471,-91.359) -146.087,-90.975 cw(c-146.471,-91.359) J2.74@-145.928,-91.359 ; J2.74@-145.753,-91.034 cw(c-145.753,-90.296) -146.275,-90.818 ccw(c-145.753,-90.296) J2.74@-145.753,-91.034 ; J2.74@-145.753,-91.034 cw(c-145.753,-90.37) -146.222,-90.84 ccw(c-145.753,-90.37) J2.74@-145.753,-91.034
  Bottom Layer w0.15: CON2.7@-159.8,-65.5 -153,-65.5 -150.8,-67.7 v1(-150.8,-90.714) ; CON2.7@-159.535,-65.765 cw(c-158.895,-66.405) -158.895,-65.5 cw(c-158.895,-64.595) CON2.7@-159.535,-65.235 ; CON2.7@-159.429,-65.871 cw(c-158.533,-66.767) -158.533,-65.5 cw(c-158.533,-64.233) CON2.7@-159.429,-65.129 ; -150.8,-90.292 cw(c-151.222,-90.292) -150.924,-90.591 ccw(c-151.222,-90.292) -150.8,-90.292 ; -150.8,-90.292 ccw(c-150.378,-90.292) -150.676,-90.591 cw(c-150.378,-90.292) -150.8,-90.292
NXDREQ0: CON2.10 J2.69 | length 49.8
  Bottom Layer w0.15: CON2.10@-161.8,-64.025 cw(c-161.8,-65.292) -160.904,-64.396 cw(c-160.008,-63.5) CON2.10@-161.275,-63.5 ; CON2.10@-161.8,-63.875 cw(c-161.8,-64.78) -161.16,-64.14 cw(c-160.52,-63.5) CON2.10@-161.425,-63.5 ; CON2.10@-161.8,-63.5 -160.8,-64.5 -151.7,-64.5 -148.3,-67.9 -148.3,-88.5 -147.952,-88.848 J2.69@-146.973,-88.848 ; -147.757,-88.848 cw(c-147.757,-89.633) J2.69@-147.203,-89.078 ; -147.757,-88.848 ccw(c-147.757,-88.064) J2.69@-147.203,-88.618 ; -147.757,-88.848 cw(c-147.757,-89.633) J2.69@-147.203,-89.078 ; -147.757,-88.848 ccw(c-147.757,-88.064) J2.69@-147.203,-88.618 ; -147.757,-88.848 cw(c-147.757,-89.633) J2.69@-147.203,-89.078 ; -147.757,-88.848 ccw(c-147.757,-88.064) J2.69@-147.203,-88.618 ; J2.69@-147.395,-88.848 cw(c-147.395,-89.271) J2.69@-147.097,-88.972 ; J2.69@-147.395,-88.848 ccw(c-147.395,-88.426) J2.69@-147.097,-88.725 ; J2.69@-147.395,-88.848 cw(c-147.395,-89.271) J2.69@-147.097,-88.972 ; J2.69@-147.395,-88.848 ccw(c-147.395,-88.426) J2.69@-147.097,-88.725 ; J2.69@-147.395,-88.848 cw(c-147.395,-89.271) J2.69@-147.097,-88.972 ; J2.69@-147.395,-88.848 ccw(c-147.395,-88.426) J2.69@-147.097,-88.725 ; -147.877,-88.848 ccw(c-147.877,-87.965) -147.253,-88.589 cw(c-147.877,-87.965) -147.877,-88.848 ; -147.737,-88.848 cw(c-147.737,-89.534) -147.253,-89.049 ccw(c-147.737,-89.534) -147.737,-88.848 ; -147.515,-88.848 ccw(c-147.515,-88.327) -147.147,-88.696 cw(c-147.515,-88.327) -147.515,-88.848
OM0: J1.59 R54.1 | length 72.6
  Top Layer w0.15: R54.1@-141.713,-105.7 v1(-121.4,-105.7) ; R54.1@-141.602,-105.549 ccw(c-141.238,-105.185) -141.238,-105.7 ; R54.1@-141.496,-105.876 cw(c-141.071,-106.301) -141.071,-105.7 ; R54.1@-141.496,-105.443 ccw(c-140.876,-104.823) -140.876,-105.7 ; v1@-121.488,-105.788 ccw(c-121.702,-106.002) -121.702,-105.7 ccw(c-121.702,-105.398) v1@-121.488,-105.612 ; -121.822,-105.7 cw(c-121.822,-106.122) v1@-121.524,-105.824 ; -121.822,-105.7 ccw(c-121.822,-105.278) v1@-121.524,-105.576 ; -121.822,-105.7 cw(c-121.822,-106.122) v1@-121.524,-105.824 ; -121.822,-105.7 ccw(c-121.822,-105.278) v1@-121.524,-105.576 ; -121.822,-105.7 cw(c-121.822,-106.122) v1@-121.524,-105.824 ; -121.822,-105.7 ccw(c-121.822,-105.278) v1@-121.524,-105.576 ; -121.822,-105.7 ccw(c-121.822,-105.278) v1@-121.524,-105.576 ; -121.822,-105.7 cw(c-121.822,-106.122) v1@-121.524,-105.824
  Bottom Layer w0.15: v1@-121.488,-105.612 ccw(c-121.702,-105.398) -121.4,-105.398 ccw(c-121.098,-105.398) v1@-121.312,-105.612 ; v1(-121.4,-105.7) -121.4,-101.4 -119.9,-99.9 -119.9,-91.8 -119.9,-84.9 -117.494,-82.494 J1.59@-106.841,-82.494 ; v1@-121.524,-105.576 ccw(c-121.822,-105.278) -121.4,-105.278 ; v1@-121.524,-105.576 ccw(c-121.822,-105.278) -121.4,-105.278 ; v1@-121.524,-105.576 ccw(c-121.822,-105.278) -121.4,-105.278 ; v1@-121.524,-105.576 ccw(c-121.822,-105.278) -121.4,-105.278 ; -121.4,-105.278 ccw(c-120.978,-105.278) v1@-121.276,-105.576 ; -121.4,-105.278 ccw(c-120.978,-105.278) v1@-121.276,-105.576 ; -121.4,-105.278 ccw(c-120.978,-105.278) v1@-121.276,-105.576 ; -121.4,-105.278 ccw(c-120.978,-105.278) v1@-121.276,-105.576 ; -107.625,-82.494 cw(c-107.625,-83.278) J1.59@-107.071,-82.724 ; -107.625,-82.494 ccw(c-107.625,-81.709) J1.59@-107.071,-82.264 ; -107.625,-82.494 cw(c-107.625,-83.278) J1.59@-107.071,-82.724 ; -107.625,-82.494 ccw(c-107.625,-81.709) J1.59@-107.071,-82.264 ; -107.625,-82.494 cw(c-107.625,-83.278) J1.59@-107.071,-82.724 ; -107.625,-82.494 ccw(c-107.625,-81.709) J1.59@-107.071,-82.264 ; J1.59@-107.263,-82.494 cw(c-107.263,-82.916) J1.59@-106.965,-82.618 ; J1.59@-107.263,-82.494 ccw(c-107.263,-82.071) J1.59@-106.965,-82.37 ; J1.59@-107.263,-82.494 cw(c-107.263,-82.916) J1.59@-106.965,-82.618 ; J1.59@-107.263,-82.494 ccw(c-107.263,-82.071) J1.59@-106.965,-82.37 ; J1.59@-107.263,-82.494 cw(c-107.263,-82.916) J1.59@-106.965,-82.618 ; J1.59@-107.263,-82.494 ccw(c-107.263,-82.071) J1.59@-106.965,-82.37 ; -107.735,-82.494 ccw(c-107.735,-81.625) -107.121,-82.24 cw(c-107.735,-81.625) -107.735,-82.494 ; -107.616,-82.494 cw(c-107.616,-83.195) -107.121,-82.699 ccw(c-107.616,-83.195) -107.616,-82.494 ; -107.373,-82.494 ccw(c-107.373,-81.988) -107.015,-82.346 cw(c-107.373,-81.988) -107.373,-82.494
PDN0: J1.61 R28.1 | length 126.1
  Top Layer w0.15: J1.61@-106.841,-83.765 -106.195,-83.119 ; J1.61@-106.841,-83.739 -106.201,-83.1 ; R28.1@-22.187,-96.94 -44.06,-96.94 -45.5,-95.5 -45.5,-90 -50.4,-85.1 -54.6,-85.1 -57.1,-82.6 -57.1,-75.8 -58.3,-74.6 -65.2,-74.6 -99.4,-74.6 -100.2,-75.4 -100.2,-79.2 -104.1,-83.1 -106.201,-83.1 ; J1.61@-106.841,-83.59 ccw(c-106.841,-83.167) J1.61@-106.542,-83.466 ; J1.61@-106.841,-83.59 ccw(c-106.841,-83.167) J1.61@-106.542,-83.466 ; J1.61@-106.841,-83.59 ccw(c-106.841,-83.167) J1.61@-106.542,-83.466 ; J1.61@-106.841,-83.44 ccw(c-106.841,-82.655) -106.286,-83.21 ; J1.61@-106.841,-83.44 ccw(c-106.841,-82.655) -106.286,-83.21 ; J1.61@-106.841,-83.44 ccw(c-106.841,-82.655) -106.286,-83.21 ; J1.61@-106.791,-83.414 ccw(c-106.791,-82.689) -106.278,-83.202 cw(c-106.791,-82.689) J1.61@-106.791,-83.414 ; J1.61@-106.791,-83.414 ccw(c-106.791,-82.75) -106.321,-83.22 cw(c-106.791,-82.75) J1.61@-106.791,-83.414 ; J1.61@-106.666,-83.765 cw(c-106.243,-83.765) J1.61@-106.542,-83.466 ; J1.61@-106.666,-83.765 cw(c-106.243,-83.765) J1.61@-106.542,-83.466 ; J1.61@-106.666,-83.765 cw(c-106.243,-83.765) J1.61@-106.542,-83.466 ; J1.61@-106.616,-83.739 cw(c-106.134,-83.739) -106.475,-83.399 ccw(c-106.134,-83.739) J1.61@-106.616,-83.739 ; J1.61@-106.616,-83.739 cw(c-106.074,-83.739) -106.457,-83.356 ccw(c-106.074,-83.739) J1.61@-106.616,-83.739 ; J1.61@-106.516,-83.765 cw(c-105.731,-83.765) -106.286,-83.21 ; J1.61@-106.516,-83.765 cw(c-105.731,-83.765) -106.286,-83.21 ; J1.61@-106.516,-83.765 cw(c-105.731,-83.765) -106.286,-83.21 ; J1.61@-106.466,-83.739 cw(c-105.622,-83.739) -106.219,-83.143 ccw(c-105.622,-83.739) J1.61@-106.466,-83.739 ; J1.61@-106.466,-83.739 cw(c-105.563,-83.738) -106.202,-83.1 ; J1.61@-106.466,-83.739 cw(c-105.563,-83.738) -106.202,-83.1 ; -22.926,-96.94 cw(c-22.926,-97.679) R28.1@-22.404,-97.157 ; -22.926,-96.94 ccw(c-22.926,-96.202) R28.1@-22.404,-96.724 ; -22.926,-96.94 cw(c-22.926,-97.679) R28.1@-22.404,-97.157 ; -22.926,-96.94 ccw(c-22.926,-96.202) R28.1@-22.404,-96.724 ; -22.926,-96.94 cw(c-22.926,-97.679) R28.1@-22.404,-97.157 ; -22.926,-96.94 ccw(c-22.926,-96.202) R28.1@-22.404,-96.724 ; -22.926,-96.94 cw(c-22.926,-97.679) R28.1@-22.404,-97.157 ; -22.926,-96.94 ccw(c-22.926,-96.202) R28.1@-22.404,-96.724 ; -22.926,-96.94 ccw(c-22.926,-96.202) R28.1@-22.404,-96.724 ; -22.926,-96.94 cw(c-22.926,-97.679) R28.1@-22.404,-97.157
PDP0: J1.73 R32.1 | length 106.6
  Top Layer w0.15: v1(-39.06,-102.74) R32.1@-22.187,-102.74 ; v1@-38.971,-102.829 cw(c-38.758,-103.042) -38.758,-102.74 cw(c-38.758,-102.439) v1@-38.971,-102.652 ; v1@-38.936,-102.864 cw(c-38.637,-103.163) -38.637,-102.74 ; v1@-38.936,-102.864 cw(c-38.637,-103.163) -38.637,-102.74 ; v1@-38.936,-102.864 cw(c-38.637,-103.163) -38.637,-102.74 ; v1@-38.936,-102.864 cw(c-38.637,-103.163) -38.637,-102.74 ; v1@-38.936,-102.617 ccw(c-38.637,-102.318) -38.637,-102.74 ; v1@-38.936,-102.617 ccw(c-38.637,-102.318) -38.637,-102.74 ; v1@-38.936,-102.617 ccw(c-38.637,-102.318) -38.637,-102.74 ; v1@-38.936,-102.617 ccw(c-38.637,-102.318) -38.637,-102.74 ; -22.926,-102.74 cw(c-22.926,-103.479) R32.1@-22.404,-102.957 ; -22.926,-102.74 ccw(c-22.926,-102.002) R32.1@-22.404,-102.524 ; -22.926,-102.74 cw(c-22.926,-103.479) R32.1@-22.404,-102.957 ; -22.926,-102.74 ccw(c-22.926,-102.002) R32.1@-22.404,-102.524 ; -22.926,-102.74 cw(c-22.926,-103.479) R32.1@-22.404,-102.957 ; -22.926,-102.74 ccw(c-22.926,-102.002) R32.1@-22.404,-102.524 ; -22.926,-102.74 cw(c-22.926,-103.479) R32.1@-22.404,-102.957 ; -22.926,-102.74 ccw(c-22.926,-102.002) R32.1@-22.404,-102.524 ; -22.926,-102.74 ccw(c-22.926,-102.002) R32.1@-22.404,-102.524 ; -22.926,-102.74 cw(c-22.926,-103.479) R32.1@-22.404,-102.957
  Bottom Layer w0.15: J1.73@-106.841,-91.359 -106.2,-92 -104.1,-92 ; -104.085,-92.015 -100.6,-95.5 -83.8,-95.5 -82,-97.3 -48.3,-97.3 -42.86,-102.74 v1(-39.06,-102.74) ; v1@-39.148,-102.829 ccw(c-39.361,-103.042) -39.361,-102.74 ccw(c-39.361,-102.439) v1@-39.148,-102.652 ; J1.73@-106.841,-91.565 cw(c-106.841,-91.988) -106.542,-91.689 ; J1.73@-106.841,-91.565 cw(c-106.841,-91.988) -106.542,-91.689 ; J1.73@-106.841,-91.565 cw(c-106.841,-91.988) -106.542,-91.689 ; J1.73@-106.666,-91.39 ccw(c-106.243,-91.39) -106.542,-91.689 ; J1.73@-106.666,-91.39 ccw(c-106.243,-91.39) -106.542,-91.689 ; J1.73@-106.666,-91.39 ccw(c-106.243,-91.39) -106.542,-91.689 ; -39.482,-102.74 cw(c-39.482,-103.163) v1@-39.183,-102.864 ; -39.482,-102.74 ccw(c-39.482,-102.318) v1@-39.183,-102.617 ; -39.482,-102.74 cw(c-39.482,-103.163) v1@-39.183,-102.864 ; -39.482,-102.74 ccw(c-39.482,-102.318) v1@-39.183,-102.617 ; -39.482,-102.74 cw(c-39.482,-103.163) v1@-39.183,-102.864 ; -39.482,-102.74 ccw(c-39.482,-102.318) v1@-39.183,-102.617 ; -39.482,-102.74 ccw(c-39.482,-102.318) v1@-39.183,-102.617 ; -39.482,-102.74 cw(c-39.482,-103.163) v1@-39.183,-102.864 ; J1.73@-106.791,-91.684 cw(c-106.791,-92.348) -106.321,-91.879 ccw(c-106.791,-92.348) J1.73@-106.791,-91.684 ; J1.73@-106.616,-91.364 ccw(c-106.121,-91.379) -106.471,-91.729 cw(c-106.121,-91.379) J1.73@-106.616,-91.364 ; J1.73@-106.466,-91.369 ccw(c-105.643,-91.393) -106.225,-91.975 cw(c-105.643,-91.393) J1.73@-106.466,-91.369
RSCTS0: COM1.7 U5.8 | length 78.2
  Top Layer w0.15: U5.8@-59.5,-25.29 -58.09,-25.29 -56.7,-23.9 -56.7,-19.6 -56,-18.9 -56,-15.6 -54.4,-14 -40.2,-14 -37.7,-11.5 -29.704,-11.5 COM1.7@-28.356,-10.152 ; U5.8@-58.626,-25.452 cw(c-58.234,-25.845) -58.234,-25.29 ; U5.8@-58.626,-25.452 cw(c-58.234,-25.845) -58.234,-25.29 ; U5.8@-58.626,-25.452 cw(c-58.234,-25.845) -58.234,-25.29 ; U5.8@-58.626,-25.452 cw(c-58.234,-25.845) -58.234,-25.29 ; U5.8@-58.626,-25.452 cw(c-58.234,-25.845) -58.234,-25.29 ; U5.8@-58.626,-25.128 ccw(c-58.234,-24.735) -58.234,-25.29 ; U5.8@-58.626,-25.128 ccw(c-58.234,-24.735) -58.234,-25.29 ; U5.8@-58.626,-25.128 ccw(c-58.234,-24.735) -58.234,-25.29 ; U5.8@-58.626,-25.128 ccw(c-58.234,-24.735) -58.234,-25.29 ; U5.8@-58.626,-25.128 ccw(c-58.234,-24.735) -58.234,-25.29 ; -29.572,-11.368 cw(c-28.356,-12.584) COM1.7@-28.356,-10.864 ; -29.572,-11.368 ccw(c-30.788,-10.152) COM1.7@-29.068,-10.152 ; -29.572,-11.368 cw(c-28.356,-12.584) COM1.7@-28.356,-10.864 ; -29.572,-11.368 ccw(c-30.788,-10.152) COM1.7@-29.068,-10.152 ; -29.572,-11.368 cw(c-28.356,-12.584) COM1.7@-28.356,-10.864 ; -29.572,-11.368 ccw(c-30.788,-10.152) COM1.7@-29.068,-10.152 ; -29.572,-11.368 cw(c-28.356,-12.584) COM1.7@-28.356,-10.864 ; -29.572,-11.368 ccw(c-30.788,-10.152) COM1.7@-29.068,-10.152 ; -29.572,-11.368 ccw(c-30.788,-10.152) COM1.7@-29.068,-10.152 ; -29.572,-11.368 cw(c-28.356,-12.584) COM1.7@-28.356,-10.864 ; -29.316,-11.112 cw(c-28.356,-12.072) COM1.7@-28.356,-10.714 ; -29.316,-11.112 ccw(c-30.276,-10.152) COM1.7@-28.918,-10.152 ; -29.316,-11.112 cw(c-28.356,-12.072) COM1.7@-28.356,-10.714 ; -29.316,-11.112 ccw(c-30.276,-10.152) COM1.7@-28.918,-10.152 ; -29.316,-11.112 cw(c-28.356,-12.072) COM1.7@-28.356,-10.714 ; -29.316,-11.112 ccw(c-30.276,-10.152) COM1.7@-28.918,-10.152 ; -29.316,-11.112 cw(c-28.356,-12.072) COM1.7@-28.356,-10.714 ; -29.316,-11.112 ccw(c-30.276,-10.152) COM1.7@-28.918,-10.152 ; -29.316,-11.112 ccw(c-30.276,-10.152) COM1.7@-28.918,-10.152 ; -29.316,-11.112 cw(c-28.356,-12.072) COM1.7@-28.356,-10.714 ; -29.06,-10.856 cw(c-28.356,-11.56) COM1.7@-28.356,-10.564 ; -29.06,-10.856 ccw(c-29.764,-10.152) COM1.7@-28.768,-10.152 ; -29.06,-10.856 cw(c-28.356,-11.56) COM1.7@-28.356,-10.564 ; -29.06,-10.856 ccw(c-29.764,-10.152) COM1.7@-28.768,-10.152 ; -29.06,-10.856 cw(c-28.356,-11.56) COM1.7@-28.356,-10.564 ; -29.06,-10.856 ccw(c-29.764,-10.152) COM1.7@-28.768,-10.152 ; -29.06,-10.856 cw(c-28.356,-11.56) COM1.7@-28.356,-10.564 ; -29.06,-10.856 ccw(c-29.764,-10.152) COM1.7@-28.768,-10.152 ; -29.06,-10.856 ccw(c-29.764,-10.152) COM1.7@-28.768,-10.152 ; -29.06,-10.856 cw(c-28.356,-11.56) COM1.7@-28.356,-10.564
RSRTS0: COM1.8 U5.7 | length 76
  Top Layer w0.15: U5.7@-59.5,-24.02 -57.92,-24.02 -57.2,-23.3 -57.2,-19.3 -56.5,-18.6 -56.5,-15.1 -55.1,-13.7 -55.1,-9.4 -53.7,-8 -31.7,-8 -31.125,-8.575 ; COM1.8@-31.125,-10.152 -31.125,-8.575 ; U5.7@-58.626,-24.182 cw(c-58.234,-24.575) -58.234,-24.02 ; U5.7@-58.626,-24.182 cw(c-58.234,-24.575) -58.234,-24.02 ; U5.7@-58.626,-24.182 cw(c-58.234,-24.575) -58.234,-24.02 ; U5.7@-58.626,-24.182 cw(c-58.234,-24.575) -58.234,-24.02 ; U5.7@-58.626,-24.182 cw(c-58.234,-24.575) -58.234,-24.02 ; U5.7@-58.626,-23.858 ccw(c-58.234,-23.465) -58.234,-24.02 ; U5.7@-58.626,-23.858 ccw(c-58.234,-23.465) -58.234,-24.02 ; U5.7@-58.626,-23.858 ccw(c-58.234,-23.465) -58.234,-24.02 ; U5.7@-58.626,-23.858 ccw(c-58.234,-23.465) -58.234,-24.02 ; U5.7@-58.626,-23.858 ccw(c-58.234,-23.465) -58.234,-24.02 ; COM1.8@-31.595,-9.617 ccw(c-32.513,-8.575) -31.125,-8.575 ; COM1.8@-31.595,-9.617 ccw(c-32.513,-8.575) -31.125,-8.575 ; COM1.8@-31.595,-9.617 ccw(c-32.513,-8.575) -31.125,-8.575 ; COM1.8@-31.595,-9.617 ccw(c-32.513,-8.575) -31.125,-8.575 ; COM1.8@-31.595,-9.617 ccw(c-32.513,-8.575) -31.125,-8.575 ; COM1.8@-31.496,-9.73 ccw(c-32.221,-8.907) -31.125,-8.907 ; COM1.8@-31.496,-9.73 ccw(c-32.221,-8.907) -31.125,-8.907 ; COM1.8@-31.496,-9.73 ccw(c-32.221,-8.907) -31.125,-8.907 ; COM1.8@-31.496,-9.73 ccw(c-32.221,-8.907) -31.125,-8.907 ; COM1.8@-31.496,-9.73 ccw(c-32.221,-8.907) -31.125,-8.907 ; COM1.8@-31.397,-9.843 ccw(c-31.928,-9.239) -31.125,-9.239 ; COM1.8@-31.397,-9.843 ccw(c-31.928,-9.239) -31.125,-9.239 ; COM1.8@-31.397,-9.843 ccw(c-31.928,-9.239) -31.125,-9.239 ; COM1.8@-31.397,-9.843 ccw(c-31.928,-9.239) -31.125,-9.239 ; COM1.8@-31.397,-9.843 ccw(c-31.928,-9.239) -31.125,-9.239 ; -31.125,-9.239 ccw(c-30.321,-9.239) COM1.8@-30.852,-9.843 ; -31.125,-9.239 ccw(c-30.321,-9.239) COM1.8@-30.852,-9.843 ; -31.125,-9.239 ccw(c-30.321,-9.239) COM1.8@-30.852,-9.843 ; -31.125,-9.239 ccw(c-30.321,-9.239) COM1.8@-30.852,-9.843 ; -31.125,-9.239 ccw(c-30.321,-9.239) COM1.8@-30.852,-9.843 ; -31.125,-8.907 ccw(c-30.029,-8.907) COM1.8@-30.753,-9.73 ; -31.125,-8.907 ccw(c-30.029,-8.907) COM1.8@-30.753,-9.73 ; -31.125,-8.907 ccw(c-30.029,-8.907) COM1.8@-30.753,-9.73 ; -31.125,-8.907 ccw(c-30.029,-8.907) COM1.8@-30.753,-9.73 ; -31.125,-8.907 ccw(c-30.029,-8.907) COM1.8@-30.753,-9.73 ; -31.125,-8.575 ccw(c-29.736,-8.575) COM1.8@-30.654,-9.617 ; -31.125,-8.575 ccw(c-29.736,-8.575) COM1.8@-30.654,-9.617 ; -31.125,-8.575 ccw(c-29.736,-8.575) COM1.8@-30.654,-9.617 ; -31.125,-8.575 ccw(c-29.736,-8.575) COM1.8@-30.654,-9.617 ; -31.125,-8.575 ccw(c-29.736,-8.575) COM1.8@-30.654,-9.617
RSRXD0: COM1.3 U5.13 | length 73.1
  Top Layer w0.15: U5.13@-53.912,-20.21 -49.11,-20.21 -48.1,-19.2 -48.1,-16.2 -47,-15.1 v1(-29.728,-15.1) ; v1@-29.816,-15.188 ccw(c-30.029,-15.402) -30.029,-15.1 ccw(c-30.029,-14.798) v1@-29.816,-15.012 ; U5.13@-53.038,-20.372 cw(c-52.646,-20.765) -52.646,-20.21 ; U5.13@-53.038,-20.372 cw(c-52.646,-20.765) -52.646,-20.21 ; U5.13@-53.038,-20.372 cw(c-52.646,-20.765) -52.646,-20.21 ; U5.13@-53.038,-20.372 cw(c-52.646,-20.765) -52.646,-20.21 ; U5.13@-53.038,-20.372 cw(c-52.646,-20.765) -52.646,-20.21 ; U5.13@-53.038,-20.048 ccw(c-52.646,-19.655) -52.646,-20.21 ; U5.13@-53.038,-20.048 ccw(c-52.646,-19.655) -52.646,-20.21 ; U5.13@-53.038,-20.048 ccw(c-52.646,-19.655) -52.646,-20.21 ; U5.13@-53.038,-20.048 ccw(c-52.646,-19.655) -52.646,-20.21 ; U5.13@-53.038,-20.048 ccw(c-52.646,-19.655) -52.646,-20.21 ; -30.15,-15.1 cw(c-30.15,-15.522) v1@-29.851,-15.224 ; -30.15,-15.1 ccw(c-30.15,-14.678) v1@-29.851,-14.976 ; -30.15,-15.1 cw(c-30.15,-15.522) v1@-29.851,-15.224 ; -30.15,-15.1 ccw(c-30.15,-14.678) v1@-29.851,-14.976 ; -30.15,-15.1 cw(c-30.15,-15.522) v1@-29.851,-15.224 ; -30.15,-15.1 ccw(c-30.15,-14.678) v1@-29.851,-14.976 ; -30.15,-15.1 ccw(c-30.15,-14.678) v1@-29.851,-14.976 ; -30.15,-15.1 cw(c-30.15,-15.522) v1@-29.851,-15.224
  Bottom Layer w0.15: v1@-29.816,-15.012 ccw(c-30.029,-14.798) -29.728,-14.798 ccw(c-29.426,-14.798) v1@-29.639,-15.012 ; v1(-29.728,-15.1) COM1.3@-29.728,-12.692 ; COM1.3@-30.231,-13.196 cw(c-31.447,-14.412) -29.728,-14.412 ; COM1.3@-30.231,-13.196 cw(c-31.447,-14.412) -29.728,-14.412 ; COM1.3@-30.231,-13.196 cw(c-31.447,-14.412) -29.728,-14.412 ; COM1.3@-30.231,-13.196 cw(c-31.447,-14.412) -29.728,-14.412 ; COM1.3@-30.231,-13.196 cw(c-31.447,-14.412) -29.728,-14.412 ; COM1.3@-30.125,-13.09 cw(c-31.085,-14.05) -29.728,-14.05 ; COM1.3@-30.125,-13.09 cw(c-31.085,-14.05) -29.728,-14.05 ; COM1.3@-30.125,-13.09 cw(c-31.085,-14.05) -29.728,-14.05 ; COM1.3@-30.125,-13.09 cw(c-31.085,-14.05) -29.728,-14.05 ; COM1.3@-30.125,-13.09 cw(c-31.085,-14.05) -29.728,-14.05 ; COM1.3@-30.019,-12.984 cw(c-30.723,-13.688) -29.728,-13.688 ; COM1.3@-30.019,-12.984 cw(c-30.723,-13.688) -29.728,-13.688 ; COM1.3@-30.019,-12.984 cw(c-30.723,-13.688) -29.728,-13.688 ; COM1.3@-30.019,-12.984 cw(c-30.723,-13.688) -29.728,-13.688 ; COM1.3@-30.019,-12.984 cw(c-30.723,-13.688) -29.728,-13.688 ; v1@-29.851,-14.976 ccw(c-30.15,-14.678) -29.728,-14.678 ; v1@-29.851,-14.976 ccw(c-30.15,-14.678) -29.728,-14.678 ; v1@-29.851,-14.976 ccw(c-30.15,-14.678) -29.728,-14.678 ; v1@-29.851,-14.976 ccw(c-30.15,-14.678) -29.728,-14.678 ; -29.728,-14.678 ccw(c-29.305,-14.678) v1@-29.604,-14.976 ; -29.728,-14.678 ccw(c-29.305,-14.678) v1@-29.604,-14.976 ; -29.728,-14.678 ccw(c-29.305,-14.678) v1@-29.604,-14.976 ; -29.728,-14.678 ccw(c-29.305,-14.678) v1@-29.604,-14.976 ; -29.728,-14.412 cw(c-28.008,-14.412) COM1.3@-29.224,-13.196 ; -29.728,-14.412 cw(c-28.008,-14.412) COM1.3@-29.224,-13.196 ; -29.728,-14.412 cw(c-28.008,-14.412) COM1.3@-29.224,-13.196 ; -29.728,-14.412 cw(c-28.008,-14.412) COM1.3@-29.224,-13.196 ; -29.728,-14.412 cw(c-28.008,-14.412) COM1.3@-29.224,-13.196 ; -29.728,-14.05 cw(c-28.37,-14.05) COM1.3@-29.33,-13.09 ; -29.728,-14.05 cw(c-28.37,-14.05) COM1.3@-29.33,-13.09 ; -29.728,-14.05 cw(c-28.37,-14.05) COM1.3@-29.33,-13.09 ; -29.728,-14.05 cw(c-28.37,-14.05) COM1.3@-29.33,-13.09 ; -29.728,-14.05 cw(c-28.37,-14.05) COM1.3@-29.33,-13.09 ; -29.728,-13.688 cw(c-28.732,-13.688) COM1.3@-29.436,-12.984 ; -29.728,-13.688 cw(c-28.732,-13.688) COM1.3@-29.436,-12.984 ; -29.728,-13.688 cw(c-28.732,-13.688) COM1.3@-29.436,-12.984 ; -29.728,-13.688 cw(c-28.732,-13.688) COM1.3@-29.436,-12.984 ; -29.728,-13.688 cw(c-28.732,-13.688) COM1.3@-29.436,-12.984
RSRXD1: COM2.3 U6.13 | length 56.8
  Top Layer w0.15: U6.13@-72.712,-20.21 -74.39,-20.21 -75.1,-19.5 -75.1,-14.9 -74.3,-14.1 -64.236,-14.1 COM2.3@-62.828,-12.692 ; -73.978,-20.21 cw(c-73.978,-20.765) U6.13@-73.586,-20.372 ; -73.978,-20.21 ccw(c-73.978,-19.655) U6.13@-73.586,-20.048 ; -73.978,-20.21 cw(c-73.978,-20.765) U6.13@-73.586,-20.372 ; -73.978,-20.21 ccw(c-73.978,-19.655) U6.13@-73.586,-20.048 ; -73.978,-20.21 cw(c-73.978,-20.765) U6.13@-73.586,-20.372 ; -73.978,-20.21 ccw(c-73.978,-19.655) U6.13@-73.586,-20.048 ; -73.978,-20.21 cw(c-73.978,-20.765) U6.13@-73.586,-20.372 ; -73.978,-20.21 ccw(c-73.978,-19.655) U6.13@-73.586,-20.048 ; -73.978,-20.21 ccw(c-73.978,-19.655) U6.13@-73.586,-20.048 ; -73.978,-20.21 cw(c-73.978,-20.765) U6.13@-73.586,-20.372 ; -64.044,-13.908 cw(c-62.828,-15.124) COM2.3@-62.828,-13.404 ; -64.044,-13.908 ccw(c-65.26,-12.692) COM2.3@-63.54,-12.692 ; -64.044,-13.908 cw(c-62.828,-15.124) COM2.3@-62.828,-13.404 ; -64.044,-13.908 ccw(c-65.26,-12.692) COM2.3@-63.54,-12.692 ; -64.044,-13.908 cw(c-62.828,-15.124) COM2.3@-62.828,-13.404 ; -64.044,-13.908 ccw(c-65.26,-12.692) COM2.3@-63.54,-12.692 ; -64.044,-13.908 cw(c-62.828,-15.124) COM2.3@-62.828,-13.404 ; -64.044,-13.908 ccw(c-65.26,-12.692) COM2.3@-63.54,-12.692 ; -64.044,-13.908 ccw(c-65.26,-12.692) COM2.3@-63.54,-12.692 ; -64.044,-13.908 cw(c-62.828,-15.124) COM2.3@-62.828,-13.404 ; -63.788,-13.652 cw(c-62.828,-14.612) COM2.3@-62.828,-13.254 ; -63.788,-13.652 ccw(c-64.748,-12.692) COM2.3@-63.39,-12.692 ; -63.788,-13.652 cw(c-62.828,-14.612) COM2.3@-62.828,-13.254 ; -63.788,-13.652 ccw(c-64.748,-12.692) COM2.3@-63.39,-12.692 ; -63.788,-13.652 cw(c-62.828,-14.612) COM2.3@-62.828,-13.254 ; -63.788,-13.652 ccw(c-64.748,-12.692) COM2.3@-63.39,-12.692 ; -63.788,-13.652 cw(c-62.828,-14.612) COM2.3@-62.828,-13.254 ; -63.788,-13.652 ccw(c-64.748,-12.692) COM2.3@-63.39,-12.692 ; -63.788,-13.652 ccw(c-64.748,-12.692) COM2.3@-63.39,-12.692 ; -63.788,-13.652 cw(c-62.828,-14.612) COM2.3@-62.828,-13.254 ; -63.532,-13.396 cw(c-62.828,-14.1) COM2.3@-62.828,-13.104 ; -63.532,-13.396 ccw(c-64.236,-12.692) COM2.3@-63.24,-12.692 ; -63.532,-13.396 cw(c-62.828,-14.1) COM2.3@-62.828,-13.104 ; -63.532,-13.396 ccw(c-64.236,-12.692) COM2.3@-63.24,-12.692 ; -63.532,-13.396 cw(c-62.828,-14.1) COM2.3@-62.828,-13.104 ; -63.532,-13.396 ccw(c-64.236,-12.692) COM2.3@-63.24,-12.692 ; -63.532,-13.396 cw(c-62.828,-14.1) COM2.3@-62.828,-13.104 ; -63.532,-13.396 ccw(c-64.236,-12.692) COM2.3@-63.24,-12.692 ; -63.532,-13.396 ccw(c-64.236,-12.692) COM2.3@-63.24,-12.692 ; -63.532,-13.396 cw(c-62.828,-14.1) COM2.3@-62.828,-13.104